# Altium PCB DriverBoardForCNC.PcbDoc
Units mm, origin at the board's own origin, x right, y up, seen from the top; angles counter-clockwise.
Board outline 85 x 42 mm, 2 copper layers (Top Layer, Bottom Layer), stack 1 mm thick; 45 components, 40 nets, 182 pads, 0 vias.
Unrouted connection lines stored in the file: 110.
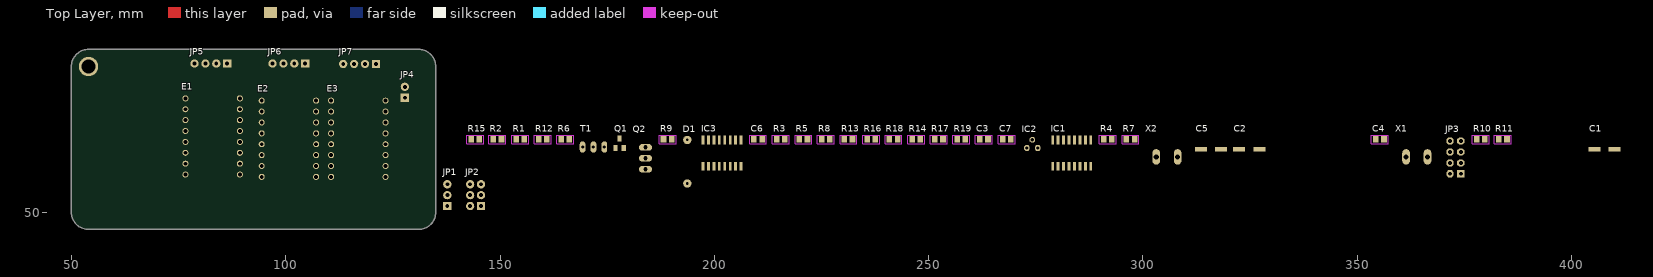
[diagram p0: Top Layer view]
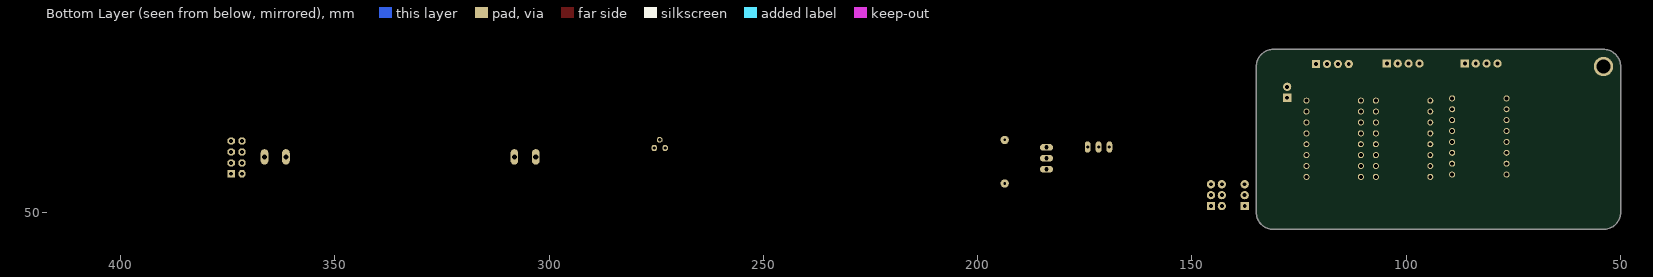
[diagram p1: Bottom Layer view, seen from below]

## Layer stack, top to bottom
Top Solder: solder mask 0.0102, Solder Resist, Dk 3.5
Top Layer: signal copper 0.01
Dielectric 1: dielectric 0.98, FR-4, Dk 4.8
Bottom Layer: signal copper 0.01
Bottom Solder: solder mask 0.0102, Solder Resist, Dk 3.5

## Board outline
50,50 ccw(c54,50) 54,46 131,46 ccw(c131,50) 135,50 135,84 ccw(c131,84) 131,88 54,88 ccw(c54,84) 50,84

## Design rules (kind name [scope] priority, off if disabled: settings)
Clearance [All] p1: gap=0.254 ignorepadtopadclearanceinfootprint=FALSE except(0: Arc-Hole Track-Hole SMDPad-Hole THPad-Hole Via-Hole Fill-Hole Poly-Hole Region-Hole Text-Hole)
Height [All] p1: minheight=0 maxheight=35 prefheight=12.7
PolygonConnect [All] p1: connectstyle=Relief reliefconductorwidth=0.254 reliefentries=4 polygonreliefangle="90 Angle" airgapwidth=0.254
RoutingVias [All] p1: holewidth=0.711 width=1.27 viastyle="Through Hole" minholewidth=0.711 minwidth=1.27 maxholewidth=0.711 maxwidth=1.27
SolderMaskExpansion [All] p1: expansion=0.102 istentingtop=FALSE
Width [All] p1: maxlimit=0.254 minlimit=0.254 preferedwidth=0.254
29 further rules are at their usual default settings.

## Components (designator, comment, footprint, x,y, rotation, side; value= is the part's Value field where it differs from the comment)
C1 "*" UD-6,3X5,8_NICHICON 407.699,64.7 r0 top value=100u
C2 "*" UD-6,3X5,8_NICHICON 324.799,64.7 r0 top value=100u
C3 "*" C0805 262.899,67 r0 top value=10u
C4 "*" C0805 355.299,67 r0 top value=0.1
C5 "*" UD-6,3X5,8_NICHICON 315.899,64.7 r0 top value=100u
C6 "*" C0805 210.2,67 r0 top value=0.1
C7 "*" C0805 268.199,67 r0 top value=1u
D1 "1N4004" DO41-10 193.7,61.8 r90 top
E1 "LV8729" LV8729_BREAKOUT 77.87,60.07 r90 top
E2 "LV8729" LV8729_BREAKOUT 95.67,59.53 r90 top
E3 "LV8729" LV8729_BREAKOUT 111.87,59.53 r90 top
IC1 "74*595D" SO16 283.399,63.8 r0 top
IC2 "78*Z" TO92 274.199,65 r0 top
IC3 "74*595D" SO16 201.8,63.8 r0 top
JP1 "LOAD EN" PLS-(1-3) 137.7,54 r90 top
JP2 "STEP MODE" PLS-(2-3) 144.3,54 r90 top
JP3 "*" JP4Q 372.899,62.8 r90 top value="STEP CONTROL"
JP4 "*" JP1 127.8,78 r0 top value="LASER EN"
JP5 "MOT1" PLS-(1-4) 82.53,84.7 r180 top
JP6 "MOT1" PLS-(1-4) 100.73,84.7 r180 top
JP7 "MOT1" PLS-(1-4) 117.23,84.6 r180 top
Q1 "BC857*SMD" SOT23-BEC 177.9,66.1 r0 top
Q2 "IRFZ44N" TO220BV 181.4,62.6 r90 top
R1 "*" R0805 154.7,67 r0 top value=1k
R2 "*" R0805 149.4,67 r0 top value=10k
R3 "*" R0805 215.5,67 r0 top value=10k
R4 "*" R0805 291.799,67 r0 top value=10k
R5 "*" R0805 220.8,67 r0 top value=10k
R6 "*" R0805 165.2,67 r0 top value=1k
R7 "*" R0805 297.099,67 r0 top value=10k
R8 "*" R0805 226,67 r0 top value=10k
R9 "*" R0805 189.1,67 r0 top value=1k
R10 "*" R0805 378.799,67 r0 top value=10k
R11 "*" R0805 383.999,67 r0 top value=10k
R12 "*" R0805 160,67 r0 top value=1k
R13 "*" R0805 231.3,67 r0 top value=10k
R14 "*" R0805 247.1,67 r0 top value=10k
R15 "*" R0805 144.2,67 r0 top value=10k
R16 "*" R0805 236.6,67 r0 top value=10k
R17 "*" R0805 252.399,67 r0 top value=10k
R18 "*" R0805 241.8,67 r0 top value=10k
R19 "*" R0805 257.599,67 r0 top value=10k
T1 "2N2222" TO92-EBC-OVAL 171.8,66.5 r0 top
X1 "*" W237-102 363.899,64.2 r0 top value=12VIN
X2 "*" W237-102 305.599,64.2 r0 top value=12VLOAD

## Footprints (in the part's own frame and the unit in brackets; to place one, negate y for a bottom-side part, rotate by r counter-clockwise, add the part's x,y. Pads: shape width x height; smd on the part's side, far side on the other; paste and mask are expansions set on the pad)
C0805 [mm] "C0805"
  rect 1.3x1.5 smd: 1(-0.95,0) 2(0.95,0)
  Top Layer keep-out lines w0.051: -1.973,-0.983 1.973,-0.983 1.973,0.983 -1.973,0.983 -1.973,-0.983
  body extent -1,-0.64 1,0.64, height 1.29
DO41-10 [mil] "DO41-10"
  round 76 / inner round 0 / far side round 76 hole 23.62: A(200,0) C(-200,0)
  body extent -217,-52 217,52, height 122
JP1 [mil] "JP1"
  rect 76x76 / inner round 70.21 / far side rect 76x76 hole 36: 1(0,-50)
  round 76 hole 36: 2(0,50)
  body extent -50,-100 50,100, height 339
JP4Q [mil] "JP4Q"
  rect 66x66 / inner round 0 / far side rect 66x66 hole 36: 1(-150,-50)
  oct 66x66 / inner round 0 / far side oct 66x66 hole 36: 2(-150,50) 3(-50,-50) 4(-50,50) 5(50,-50) 6(50,50) 7(150,-50) 8(150,50)
  body extent -200,-100 200,100, height 339
LV8729_BREAKOUT [mm] "LV8729_BREAKOUT"
  round 1.408 / inner round 0 / far side round 1.408 hole 0.9: 1A(8.89,1.27) 1B(11.43,1.27) 2A(6.35,1.27) 2B(3.81,1.27) DIR(16.51,-11.43) EN(-1.27,-11.43) GND(16.51,1.27) GND@0(1.27,1.27) MS1(1.27,-11.43) MS2(3.81,-11.43) MS3(6.35,-11.43) RST(8.89,-11.43) SLP(11.43,-11.43) STEP(13.97,-11.43) VDD(13.97,1.27) VMOT(-1.27,1.27)
  body extent -2.55,-12.73 17.8,2.52, height 26.01
PLS-(1-3) [mil] "PLS-(1-3)"
  rect 76x76 / inner round 0 / far side rect 76x76 hole 35.43: 1(-100,0)
  round 76 / inner round 0 / far side round 76 hole 36: 2(0,0) 3(100,0)
  body extent -150,-50 150,50, height 339
PLS-(1-4) [mil] "PLS-(1-4)"
  rect 76x76 / inner round 0 / far side rect 76x76 hole 35.43: 1(-150,0)
  round 76 / inner round 0 / far side round 76 hole 36: 2(-50,0) 3(50,0) 4(150,0)
  body extent -200,-50 200,50, height 339
PLS-(2-3) [mil] "PLS-(2-3)"
  rect 76x76 / inner round 0 / far side rect 76x76 hole 35.43: 1(-100,-50)
  round 76 / inner round 0 / far side round 76 hole 35.43: 2(-100,50)
  round 76 / inner round 0 / far side round 76 hole 36: 3(0,-50) 4(0,50) 5(100,-50) 6(100,50)
  body extent -150,-101 150,99, height 339
R0805 [mm] "R0805"
  rect 1.3x1.5 smd: 1(-0.95,0) 2(0.95,0)
  Top Layer keep-out lines w0.051: -1.973,-0.983 -1.973,0.983 1.973,0.983 1.973,-0.983 -1.973,-0.983
  body extent -1.26,-0.65 1.26,0.6, height 0.51
SO16 [mil] "SO16"
  rect 26x80 smd: 1(-175,-121) 2(-125,-121) 3(-75,-121) 4(-25,-121) 5(25,-121) 6(75,-121) 7(125,-121) 8(175,-121) 9(175,121) 10(125,121) 11(75,121) 12(25,121) 13(-25,121) 14(-75,121) 15(-125,121) 16(-175,121)
  body extent -198,-121 198,121, height 79
SOT23-BEC [mm] "SOT23-BEC"
  rect 1x1.4 smd: B(-0.95,-1.1) C(0,1.1) E(0.95,-1.1)
  body extent -1.45,-1.14 1.45,1.19, height 1
TO92 [mil] "TO92"
  oct 52x52 / inner round 0 / far side oct 52x52 hole 32: 1(-50,0) 2(0,75) 3(50,0)
  body extent -98,-55 99,116, height 323
TO92-EBC-OVAL [mil] "TO92-EBC-OVAL"
  oval 52x104 / inner round 0 / far side oval 52x104 hole 32: B(0,-50) C(100,-50) E(-100,-50)
  body extent -108,-123 108,49, height 323
TO220BV [mil] "TO220BV"
  oval 60x120 / inner round 0 / far side oval 60x120 hole 40: D(0,-100) G(-100,-100) S(100,-100)
  body extent -200,-155 200,25, height 730
UD-6,3X5,8_NICHICON [mm] "UD-6,3X5,8_NICHICON"
  rect 2.8x1 smd: +(2.35,0) -(-2.35,0)
  body extent -3.67,-3.3 3.63,3.3, height 5.41
W237-102 [mil] "W237-102"
  oval 70.5x141 / inner round 0 / far side oval 70.5x141 hole 47: 1(-98.43,-50) 2(98.43,-50)
  body extent -209,-187 201,120, height 409

## Part data
C1 C2 C5: library part CPOL-USUD-6,3X5,8, "POLARIZED CAPACITOR, American symbol", DeviceName=UD-6,3X5,8, DeviceSetName=CPOL-US, GateName_1=G$1, LibraryName=rcl, POPULARITY=0, SPICEPREFIX=C, SymbolName_1=CPOL-US
C3 C4 C6 C7: library part C-EUC0805, "CAPACITOR, European symbol", DeviceName=C0805, DeviceSetName=C-EU, GateName_1=G$1, LibraryName=rcl, POPULARITY=88, SPICEPREFIX=C, SymbolName_1=C-EU
D1: "DIODE   general purpose rectifier, 1 A", DeviceSetName=1N4004, GateName_1=1, LibraryName=diode, SymbolName_1=D
IC1 IC3: "8-bit SHIFT REGISTER, output latch", DeviceName=D, DeviceSetName=74*595, GateName_1=A, GateName_2=P, LibraryName=74xx-eu, POPULARITY=21, SymbolName_1=74595, SymbolName_2=PWRN
  IC3: GND=GND, VCC=VCC
IC2: "Positive VOLTAGE REGULATOR   Source: http://cache.national.com/ds/LM/LM78L05.pdf http://www.fairchildsemi.com/ds/LM/LM7805.pdf", DeviceName=Z, DeviceSetName=78*, GateName_1=A1, GND=GND, LibraryName=linear, POPULARITY=12, SymbolName_1=78XX
JP1: library part PLS-(1х3), DeviceSetName=PLS-(1х3), GateName_1=G$1, LibraryName=jumper, SymbolName_1=PLS-(1х3)
JP2: library part PLS-(2х3), DeviceSetName=PLS-(2х3), GateName_1=G$1, LibraryName=jumper, SymbolName_1=PLS-(2х3)
JP3: library part JP4Q, "JUMPER", DeviceSetName=JP4Q, GateName_1=B, LibraryName=jumper, SymbolName_1=J4
JP4: library part JP1Q, "JUMPER", DeviceSetName=JP1Q, GateName_1=A, LibraryName=jumper, SymbolName_1=J1
JP5 JP6 JP7: library part PLS-(1х4), DeviceSetName=PLS-(1х4), GateName_1=G$1, LibraryName=jumper, SymbolName_1=PLS-(1х4)
Q1: "PNP Transistror", DeviceName=SMD, DeviceSetName=BC857*, GateName_1=G$1, LibraryName=transistor-pnp, POPULARITY=3, SymbolName_1=PNP
Q2: "Cool MOS Power Transistor", DeviceSetName=IRFZ44N, GateName_1=G$1, LibraryName=veres, SymbolName_1=N-MOSFET
R1 R2 R3 R4 R5 R6 R7 R8 R9 R10 R11 R12 R13 R14 R15 R16 R17 R18 R19: library part R-US_R0805, "RESISTOR, American symbol", DeviceName=R0805, DeviceSetName=R-US_, GateName_1=G$1, LibraryName=rcl, POPULARITY=85, SPICEPREFIX=R, SymbolName_1=R-US
T1: "NPN TRANSISTORBig oval pads", DeviceSetName=2N2222, GateName_1=G$1, LibraryName=adafruit, SymbolName_1=NPN
X1 X2: library part W237-102, "WAGO SCREW CLAMP", MPN=237-102, DeviceSetName=W237-102, GateName_1=-1, GateName_2=-2, LibraryName=con-wago-500, MF=MF, OC_FARNELL=unknown, OC_NEWARK=70K9898, POPULARITY=32, SymbolName_1=KL, SymbolName_2=KL+V
E1 E2 E3: DeviceSetName=LV8729, GateName_1=G$1, LibraryName=RAMPS_1.4.2.3, SymbolName_1=LV8729

## Free pads (board coordinates)
  round 4.5 hole 3.2: 1(54,84)

## Nets (pads, with @x,y where several pads share a name; then routed paths per layer and width w, separated by ;. In a path a pad name is that pad's centre, name@x,y a point inside that pad or via, vN(x,y) a via of type N, cw(c..) or ccw(c..) an arc to the next point about the centre after c; other vN are vias at no path point)
+5: C6.1 C7.1 E1.VDD E2.VDD E3.VDD IC2.1 IC3.16 R4.2 R7.2
+12V: C1.+ C2.+ C3.1 C4.1 E1.VMOT E2.VMOT IC2.3 X1.2
GND: C1.- C2.- C3.2 C4.2 C5.- C6.2 C7.2 E1.GND E1.GND@0 E2.GND E2.GND@0 E3.GND@0 IC2.2 IC3.8 JP1.1 JP2.4 JP3.7 JP3.8 JP4.1 Q2.S R2.1 R3.1 R5.1 R8.1 R10.2 R11.2 R13.1 R14.1 R15.1 R16.1 R17.1 R18.1 R19.1 T1.E X1.1 X2.2
NetD1_A: D1.A Q2.D
NetE1_1A: E1.1A JP5.3
NetE1_1B: E1.1B JP5.4
NetE1_2A: E1.2A JP5.2
NetE1_2B: E1.2B JP5.1
NetE1_DIR: E1.DIR JP3.1
NetE1_EN: E1.EN E2.EN JP3.6 R11.1
NetE1_MS1: E1.MS1 IC1.15 R13.2
NetE1_MS2: E1.MS2 IC1.1 R14.2
NetE1_MS3: E1.MS3 IC1.2 R16.2
NetE1_RST: E1.RST E2.RST JP3.4 R10.1
NetE1_STEP: E1.STEP JP3.2
NetE2_1A: E2.1A JP6.3
NetE2_1B: E2.1B JP6.4
NetE2_2A: E2.2A JP6.2
NetE2_2B: E2.2B JP6.1
NetE2_DIR: E2.DIR JP3.5
NetE2_MS1: E2.MS1 IC1.3 R17.2
NetE2_MS2: E2.MS2 IC1.4 R18.2
NetE2_MS3: E2.MS3 IC1.5 R19.2
NetE2_STEP: E2.STEP JP3.3
NetE3_1A: E3.1A JP7.3
NetE3_1B: E3.1B JP7.4
NetE3_2A: E3.2A JP7.2
NetE3_2B: E3.2B JP7.1
NetIC1_10: IC1.10 JP2.2 R4.1
NetIC1_11: IC1.11 IC1.12 JP2.1 JP2.3 R5.2 R8.2
NetIC1_13: IC1.13 JP2.5 R7.1
NetIC1_14: IC1.14 JP2.6 R3.2
NetJP1_2: JP1.2 JP4.2
NetJP1_3: JP1.3 R1.1
NetQ1_B: Q1.B R6.2 R9.1
NetQ1_C: Q1.C R12.1
NetQ2_G: Q2.G R12.2 R15.2
NetR1_2: R1.2 R2.2 T1.B
NetR6_1: R6.1 T1.C
V+: C5.+ D1.C Q1.E R9.2 X2.1
pads on no net: E1.SLP E2.SLP E3.DIR E3.EN E3.GND E3.MS1 E3.MS2 E3.MS3 E3.RST E3.SLP E3.STEP E3.VMOT IC1.6 IC1.7 IC1.8 IC1.9 IC1.16 IC3.1 IC3.2 IC3.3 IC3.4 IC3.5 IC3.6 IC3.7 IC3.9 IC3.10 IC3.11 IC3.12 IC3.13 IC3.14 IC3.15

## Silkscreen, mask and mechanical layers (free items; w line width, h text height)
Mechanical 1:
  circle w0.2: c131,50 r1.6
  circle w0.2: c54,50 r1.6
  circle w0.2: c131,84 r1.6
  circle w0.2: c54,84 r1.6
  lines w0.2: 50,50 ccw(c54,50) 54,46 131,46 ccw(c131,50) 135,50 135,84 ccw(c131,84) 131,88 54,88 ccw(c54,84) 50,84 50,50

## Text inside footprints (layer, text, board x,y; h text height)
E1: Mechanical 7 "EN" at 88.03,59.435 h0.94 r180; Mechanical 7 "MS1" at 88.03,61.975 h0.94 r180; Mechanical 7 "MS2" at 88.03,64.515 h0.94 r180; Mechanical 7 "MS3" at 88.03,67.055 h0.94 r180; Mechanical 7 "RST" at 88.03,69.595 h0.94 r180; Mechanical 7 "STEP" at 88.03,74.675 h0.94 r180; Mechanical 7 "DIR" at 88.03,77.215 h0.94 r180; Mechanical 7 "Vmot" at 77.87,58.165 h0.94; Mechanical 7 "GND" at 77.87,60.705 h0.94; Mechanical 7 "2B" at 77.87,63.245 h0.94; Mechanical 7 "2A" at 77.87,65.785 h0.94; Mechanical 7 "1A" at 77.87,68.325 h0.94; Mechanical 7 "1B" at 77.87,70.865 h0.94; Mechanical 7 "VDD" at 77.87,73.405 h0.94; Mechanical 7 "GND" at 77.87,75.945 h0.94; Mechanical 7 "SLP" at 88.03,72.135 h0.94 r180
E2: Mechanical 7 "EN" at 105.83,58.895 h0.94 r180; Mechanical 7 "MS1" at 105.83,61.435 h0.94 r180; Mechanical 7 "MS2" at 105.83,63.975 h0.94 r180; Mechanical 7 "MS3" at 105.83,66.515 h0.94 r180; Mechanical 7 "RST" at 105.83,69.055 h0.94 r180; Mechanical 7 "STEP" at 105.83,74.135 h0.94 r180; Mechanical 7 "DIR" at 105.83,76.675 h0.94 r180; Mechanical 7 "Vmot" at 95.67,57.625 h0.94; Mechanical 7 "GND" at 95.67,60.165 h0.94; Mechanical 7 "2B" at 95.67,62.705 h0.94; Mechanical 7 "2A" at 95.67,65.245 h0.94; Mechanical 7 "1A" at 95.67,67.785 h0.94; Mechanical 7 "1B" at 95.67,70.325 h0.94; Mechanical 7 "VDD" at 95.67,72.865 h0.94; Mechanical 7 "GND" at 95.67,75.405 h0.94; Mechanical 7 "SLP" at 105.83,71.595 h0.94 r180
E3: Mechanical 7 "EN" at 122.03,58.895 h0.94 r180; Mechanical 7 "MS1" at 122.03,61.435 h0.94 r180; Mechanical 7 "MS2" at 122.03,63.975 h0.94 r180; Mechanical 7 "MS3" at 122.03,66.515 h0.94 r180; Mechanical 7 "RST" at 122.03,69.055 h0.94 r180; Mechanical 7 "STEP" at 122.03,74.135 h0.94 r180; Mechanical 7 "DIR" at 122.03,76.675 h0.94 r180; Mechanical 7 "Vmot" at 111.87,57.625 h0.94; Mechanical 7 "GND" at 111.87,60.165 h0.94; Mechanical 7 "2B" at 111.87,62.705 h0.94; Mechanical 7 "2A" at 111.87,65.245 h0.94; Mechanical 7 "1A" at 111.87,67.785 h0.94; Mechanical 7 "1B" at 111.87,70.325 h0.94; Mechanical 7 "VDD" at 111.87,72.865 h0.94; Mechanical 7 "GND" at 111.87,75.405 h0.94; Mechanical 7 "SLP" at 122.03,71.595 h0.94 r180
X1: Mechanical 7 "1" at 359.367,64.835 h1.97; Mechanical 7 "2" at 364.32,64.835 h1.97
X2: Mechanical 7 "1" at 301.067,64.835 h1.97; Mechanical 7 "2" at 306.02,64.835 h1.97